# Altium PCB TinyArduino.PcbDoc
Units mil, origin at the board's own origin, x right, y up, seen from the top; angles counter-clockwise.
Board outline 477 x 643 mil, 4 copper layers (Top Layer, Signal Layer 1, Signal Layer 2, Bottom Layer), stack 30.634 mil thick; 13 components, 12 nets, 45 pads, 2 vias.
Unrouted connection lines stored in the file: 8.
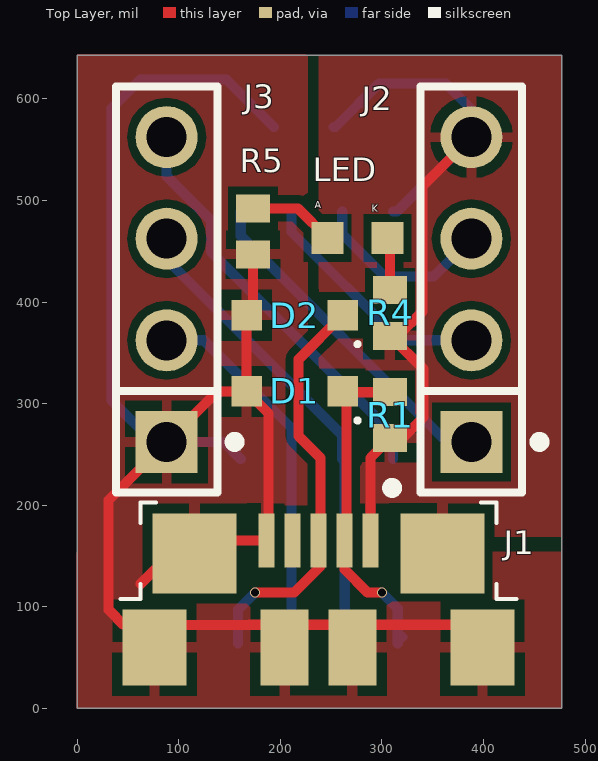
[diagram p0: Top Layer view]
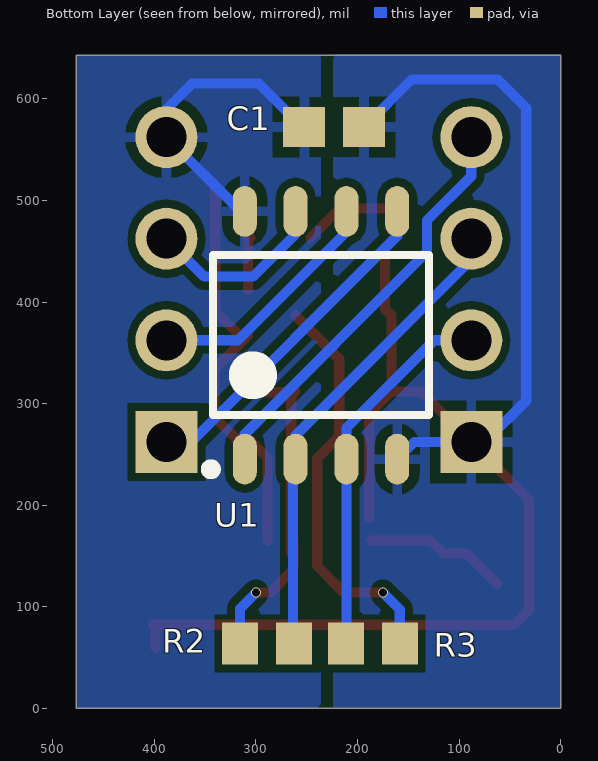
[diagram p1: Bottom Layer view, seen from below]

## Layer stack, top to bottom
Top Solder: solder mask 0.4, Solder Resist, Dk 3.5
Top Layer: signal copper 1.4
Dielectric 1: core 10, FR-4, Dk 4.2
Signal Layer 1: signal copper 1.417
Dielectric 3: prepreg 5, Dk 4.2
Signal Layer 2: signal copper 1.417
Dielectric 2: core 10, Dk 4.2
Bottom Layer: signal copper 1.4
Bottom Solder: solder mask 0.4, Solder Resist, Dk 3.5

## Board outline
477,0 477,643 0,643 0,0

## Design rules (kind name [scope] priority, off if disabled: settings)
AssemblyTestpoint [All] p1: testpointundercomponent=TRUE minsize=10 maxsize=100 preferedsize=60 minholesize=0 maxholesize=40 preferedholesize=32 testpointgrid=1 usegrid=FALSE gridtolerance=0.01 allowsidetop=TRUE allowsidebottom=TRUE
Clearance [All] p1: gap=8 ignorepadtopadclearanceinfootprint=FALSE
FabricationTestpoint [All] p1: side=3 testpointundercomponent=TRUE minsize=10 maxsize=100 preferedsize=60 minholesize=0 maxholesize=40 preferedholesize=32 testpointgrid=1 allowsidetop=TRUE allowsidebottom=TRUE usegrid=FALSE gridtolerance=0.01
MinimumSolderMaskSliver [All] p1: minsoldermaskwidth=3
PolygonConnect [All] p1: connectstyle=Relief reliefconductorwidth=10 reliefentries=4 polygonreliefangle="90 Angle" airgapwidth=10
RoutingVias [All] p1: holewidth=8 width=10 viastyle="Through Hole" minholewidth=8 minwidth=10 maxholewidth=8 maxwidth=10
SilkToSolderMaskClearance [IsPad] p1: minsilkscreentomaskgap=3 clearancetoexposedcopper=TRUE
SolderMaskExpansion [All] p1: expansion=4
Width [All] p1: maxlimit=10 minlimit=10 preferedwidth=10
26 further rules are at their usual default settings.

## Components (designator, comment, footprint, x,y, rotation, side; value= is the part's Value field where it differs from the comment)
C1 "0603YC104JAT2A" CAPC1608X90X35NL15T15 223.09,572.32 r0 bottom value=Value
D1 "Diodes Inc. B0540WS-7" PCB-6tqbiewd2diqb4h5r69p-1 214,312 r180 top
D2 "Diodes Inc. B0540WS-7" PCB-6tqbiewd2diqb4h5r69p-1 214,387 r180 top
J1 "ZX62R-B-5P" HIRO-ZX62R-B-5P_V 237.54,112.66 r0 top locked
J2 "Conn_Molex_90120-0764_eec" Molex_90120-0764_0 388.09,412.32 r90 top locked
J3 "Conn_Molex_90120-0764_eec" Molex_90120-0764_0 88.09,412.32 r90 top locked
LED "LED_AvagoHSMG-C190" AVAG-HSMX-C190 276,463 r0 top locked (schematic designator *)
R1 "Res_Vishay_CRCW06031K50FKEA_eec" RESC1609X50X30LL10T20 308,288.58 r270 top value=1.5K
R2 "CRCW060368R0JNEA" RESC1609X50X30ML10T20 289,64 r0 bottom value=68
R3 "CRCW060368R0JNEA" RESC1609X50X30ML10T20 185,64 r180 bottom value=68
R4 "CRCW0603390RFKEA" RESC1609X50X30LL10T20 308,389.42 r90 top locked value=390
R5 "CRCW06030000Z0EA" RESC1609X50X30LL10T20 173.09,469.58 r270 top locked
U1 "ATtiny85-20SU" 8S2_L 236,367.32 r90 bottom

## Footprints (in the part's own frame and the unit in brackets; to place one, negate y for a bottom-side part, rotate by r counter-clockwise, add the part's x,y. Pads: shape width x height; smd on the part's side, far side on the other; paste and mask are expansions set on the pad)
8S2_L [mm] "SOP, 8-Leads, Body 5.3x5.3mm, Pitch 1.27mm, IPC High Density"
  oval 1.27x0.6 smd: 1(-3.096,1.905) 2(-3.096,0.635) 3(-3.096,-0.635) 4(-3.096,-1.905) 5(3.096,-1.905) 6(3.096,-0.635) 7(3.096,0.635) 8(3.096,1.905)
  silkscreen extent -3.47,-2.7 2,2.88, body extent -2.7,-2.68 2.7,2.68, height 0.25
AVAG-HSMX-C190 [mm] "AVAG-HSMX-C190"
  rect 0.8x0.8 smd: 1(-0.75,0) 2(0.75,0)
  body extent -0.85,-0.45 0.85,0.45, height 0.9
CAPC1608X90X35NL15T15 [mm] "CAPC1608X90X35NL15T15"
  rect 1.05x1 smd: 1(-0.75,0) 2(0.75,0)
  body extent -0.8,-0.4 0.8,0.4, height 0.55
HIRO-ZX62R-B-5P_V [mm]
  rect 0.4x1.35 smd: 1(1.3,1.338) 2(0.65,1.338) 3(0,1.338) 4(-0.65,1.338) 5(-1.3,1.338)
  rect 2.1x2 smd: 6(-3.1,1.012) 11(3.1,1.012)
  rect 1.6x1.9 smd: 7(-4.1,-1.338) 10(4.1,-1.338)
  rect 1.2x1.9 smd: 8(-0.85,-1.338) 9(0.85,-1.338)
  silkscreen extent -4.95,-0.13 4.95,2.78, body extent -4.4,-3.95 4.4,1.78, height 2.71
Molex_90120-0764_0 [mm]
  rect 1.55x1.55 hole 1 paste-1000 mask+0: 1(-3.81,0)
  round 1.55 hole 1 paste-1000 mask+0: 2(-1.27,0) 3(1.27,0) 4(3.81,0)
  silkscreen extent -5.08,-1.83 5.08,1.27, body extent -5.08,-1.26 5.08,1.24, height 5.31
PCB-6tqbiewd2diqb4h5r69p-1 [mil] "DIOD-1N4148WS-SOD-323-2"
  rect 30x30 smd: 1(-47.24,0) 2(47.24,0)
  silkscreen extent -64,27 -60,31, body extent -35,-28 35,28, height 47
RESC1609X50X30LL10T20 [mm] "RESC1609X50X30LL10T20"
  rect 0.7x0.85 smd: 1(-0.575,0) 2(0.575,0)
  body extent -0.82,-0.48 0.82,0.48, height 0.5
RESC1609X50X30ML10T20 [mm] "RESC1609X50X30ML10T20"
  rect 0.9x1.05 smd: 1(-0.675,0) 2(0.675,0)
  body extent -0.82,-0.48 0.82,0.48, height 0.5

## Part data
C1: "Imported", Built_By=EMA_UL_Team, C="Copyright (C) 2015 Accelerated Designs. All rights reserved", Manufacturer_Part_Number=0603YC104JAT2A, RefDes=RefDes, Type=DEV, Vendor="AVX Corporation"
D1 D2: library part B0540WS-7, "DIODE SCHOTTKY 40V 500MA SOD323", Average Rectified Current=500mA, Capacitance=125pF, Forward Voltage=550mV, Manufacturer=Diodes, Max Forward Surge Current (Ifsm)=3A, Max Operating Temperature=125°C, Max Repetitive Reverse Voltage (Vrrm)=40V, Min Operating Temperature=-40°C, Package Quantity=3000, Peak Reverse Current=5uA, Supplier Part Number 1=B0540WSDICT-ND, Category="Productos semiconductores discretos", Contact Plating=Matte,Tin, Current Rating=500mA, Element Configuration=Single, Forward Current=500mA, Height=1mm, Lead Free="Lead Free", Length=1.8mm, Manufacturer Part Number=B0540WS-7, Max Reverse Voltage (DC)=40V, Mount="Surface Mount", Number of Pins=2, Output Current=500mA, Packaging="Tape and Reel", Peak Non-Repetitive Surge Current=3A, Polarity=Standard, Pricing 1="1=0.43, 10=0.317, 100=0.1796, 500=0.11896, 1000=0.09121 (USD)", Radiation Hardening=No, REACH SVHC="No SVHC", Stock 1=122360, Supplier 1=Digi-Key, Termination=SMD/SMT, Voltage Rating (DC)=40V, Weight=0.000173oz, Width=1.4mm
J1: "Connector; USBMicro-B,Reverse type, SMT; 5 Position; Right Angle", Operating Temperature="-30 to 85 degC", ComponentLink1Description="Manufacturer URL", ComponentLink1URL=http://www.hirose.com/‎, ComponentLink2Description=Datasheet, ComponentLink2URL=http://www.hirose.co.jp/cataloge_hp/e24200011.pdf, DatasheetVersion=08/2010, Mounting Technology="Surface Mount", PackageDescription="5-Pin USB Micro-B R/A Connector", PackageReference=ZX62R-B-5P, PartNumber=ZX62R-B-5P
J2 J3: "CONN 4 Positions Header, Breakaway Connector 0.100\" (2.54mm) Through Hole Gold", Current - Maximum per Contact=3.0A, Digikey Part Number=WM8086-ND, Manufacturer=Molex, Mouser Part Number=538-90120-0764, Package=HDR4, Part Number=90120-0764, Temperature="-55°C to +125°C", Temperature Range High=+125°C, Temperature Range Low=-55°C, Voltage - Maximum=350V, ComponentLink1Description=Upverter, ComponentLink1URL=https://upverter.com/upn/revision/abd89bfd3815e4cd/, ComponentLink2Description=Datasheet, ComponentLink2URL=http://www.molex.com/pdm_docs/sd/901200764_sd.pdf, Contact Length - Mating=6.75mm, Contact Length - Post=2.90mm, Digikey Description="CONN 4 Positions Header, Breakaway Connector 0.100\" (2.54mm) Through Hole Gold", helpURL=https://upverter.com/upn/revision/abd89bfd3815e4cd/, Insulation Height=2.50mm, Lead Free=yes, Number of Positions=4, Pitch=2.54mm, RoHS=TRUE, Supplier 1=Digi-Key, Supplier 2=Mouser, Supplier Part Number 1=WM8086-ND, Supplier Part Number 2=538-90120-0764
R1: "RES 1.5k Ohm ±1% 0.1W, 1/10W Chip Resistor 0603 (1608 Metric) Automotive AEC-Q200 Thick Film", Digikey Part Number=541-1.50KHCT-ND, Manufacturer=Vishay, Mouser Part Number=71-CRCW0603-1.5K-E3, Package="0603 (1608 metric)", Part Number=CRCW06031K50FKEA, Power=100mW, Resistance=1.5K, Temperature="-55°C to +155°C", Temperature Coefficient=±100ppm/°C, Temperature Range High=+155°C, Temperature Range Low=-55°C, Tolerance=±1%, Voltage=75V, ComponentLink1Description=Upverter, ComponentLink1URL=https://upverter.com/upn/revision/92de3c491728bf4e/, ComponentLink2Description=Datasheet, ComponentLink2URL=http://www.vishay.com/docs/20035/dcrcwe3.pdf, Digikey Description="RES 1.5k Ohm ±1% 0.1W, 1/10W Chip Resistor 0603 (1608 Metric) Automotive AEC-Q200 Thick Film", helpURL=https://upverter.com/upn/revision/92de3c491728bf4e/, Ipc Land Pattern Name=RESC16080X45, Lead Free=yes, Price=0.0140695309128, RoHS=TRUE, Supplier 1=Digi-Key, Supplier 2=Mouser, Supplier Part Number 1=541-1.50KHCT-ND, Supplier Part Number 2=71-CRCW0603-1.5K-E3
R2 R3: "RES SMD 68 OHM 5% 1/10W 0603", Built_By=EMA_UL_Team, C="Copyright (C) 2015 Accelerated Designs. All rights reserved", Manufacturer_Part_Number=CRCW060368R0JNEA, RefDes=RefDes, Type=DEV, Vendor=Vishay
R4: "Imported", Manufacturer_Part_Number=CRCW0603390RFKEAHP, Built_By=EMA_UL_Team, C="Copyright (C) 2015 Accelerated Designs. All rights reserved", RefDes=RefDes, Type=DEV, Vendor=Vishay
R5: "0O 1%", ComponentLink1Description=Datasheet, ComponentLink1URL=http://www.vishay.com/docs/20035/dcrcwe3.pdf, PackageReference=0603, PartNumber=CRCW06030000Z0EA
U1: library part ATTINY85-20SU, "8-bit AVR Microcontroller, 20MHz, 2.7-5.5V, 8K Flash, 512 Bytes EEPROM, 512 Bytes SRAM, Industrial Grade (-40°C to 85°C), 8-Lead SOIC, Pb-Free", ComponentLink1Description="Manufacturer URL", ComponentLink1URL=http://www.atmel.com/, ComponentLink2Description="ATtiny25/45/85 Datasheet", ComponentLink2URL=http://www.atmel.com/dyn/resources/prod_documents/doc2586.pdf, ComponentLink3Description="ATtiny25/45/85 Summary", ComponentLink3URL=http://www.atmel.com/dyn/resources/prod_documents/2586S.pdf, DatasheetVersion="revN, Apr-2011", PackageDescription="8-Lead, 0.208\" Body, Plastic Small Outline Package (EIAJ)", PackageReference=8S2, PackageVersion="revF, Apr-2008", PartNumber=ATTINY85-20SU, RevisionNote="DatasheetVersion updated. URLs added."

## Via types
v1: diameter 10, hole 8, Top Layer to Bottom Layer, 2 vias

## Nets (pads, with @x,y where several pads share a name; then routed paths per layer and width w, separated by ;. In a path a pad name is that pad's centre, name@x,y a point inside that pad or via, vN(x,y) a via of type N, cw(c..) or ccw(c..) an arc to the next point about the centre after c; other vN are vias at no path point)
+5V: C1.2 J1.1 J1.11 J2.4 R1.2 R4.1 U1.8 | length 783.9
  Top Layer w10: J1.1 288.72,246.65 R1.2 ; R1.2@311.62,265.94 311.62,257.53 341,286.91 341,333.78 R4.1 315.78,366.78 340,391 340,514.23 J2.4
  Bottom Layer w10: C1.2 254.32,572.32 297,615 363,615 388.09,589.91 J2.4 314.98,489.21 U1.8
\R\E\S\E\T\: J3.4 U1.1 | length 409.2
  Bottom Layer w10: J3.4 88.09,523.85 131.6,480.34 131.6,449.4 311,270 U1.1
D+: D2.1 J1.3 R3.2 | length 406
  Top Layer w10: v1(175,114) 213.46,114 239.62,140.16 239.62,246.38 218,268 218,343.76 D2.1
  Bottom Layer w10: R3.2 158.43,97.43 v1(175,114)
D-: D1.1 J1.2 R1.1 R2.2 | length 338.7
  Top Layer w10: D1.1 D1.1@262.03,311.21 ; J1.2 263.13,136.87 286,114 v1(300,114) ; J1.2@265.21,152.79 265.21,308.03 D1.1@262.03,311.21 ; R1.1 D1.1@262.03,311.21
  Bottom Layer w10: v1(300,114) 315.57,98.43 R2.2 ; R2.2@319.57,70 R2.2@320,70.43
GND: C1.1 D1.2 D2.2 J1.5 J1.6 J1.7 J1.8 J1.9 J1.10 J3.1 R5.2 U1.4 | length 1728.7
  Top Layer w10: 62.54,122.66 92.4,152.52 J1.6 128.28,165.32 J1.5 ; R5.2 173.09,393.33 D2.2 D1.2 ; J1.5@188.44,187.63 188.44,290.32 D1.2 ; J1.10 J1.10@398.95,82.32 ; J1.10@401.04,82.32 J1.10@398.95,82.32 ; D1.2 137.77,312 J3.1 31,205.23 31,97 46,82 169.52,82 169.83,82.32 J1.10@398.95,82.32
  Bottom Layer w10: U1.4 144.11,262.32 J3.1 74.68,262.32 34,303 34,591 62,619 146.87,619 C1.1
Net*_1: LED.1 R5.1 | length 85.5
  Top Layer w10: R5.1 217.25,492.22 LED.1
Net*_2: LED.2 R4.2 | length 52
  Top Layer w10: LED.2 308,460.53 R4.2
PB0: J2.1 U1.5 | length 335.2
  Bottom Layer w10: U1.5 161,465.1 363.78,262.32 J2.1
PB1: J2.2 U1.6 | length 241.5
  Bottom Layer w10: U1.6 211,469 317.68,362.32 J2.2
PB2: J2.3 U1.7 | length 182.1
  Bottom Layer w10: U1.7 261,467 303,425 350.77,425 J2.3
PB3: J3.3 R2.1 U1.2 | length 464.9
  Bottom Layer w10: J3.3 88.09,441.91 261,269 U1.2 263.43,243 R2.1@263.43,70
PB4: J3.2 R3.1 U1.3 | length 364.9
  Bottom Layer w10: J3.2 124.68,362.32 211,276 U1.3 211,70.57 R3.1@211.57,70
pads on no net: J1.4

## Polygon pours and split planes (outlines as drawn)
GND on Top Layer "+5V" (solid, pour order 14): 0,152.52 227,152.52 227,642 225,644 0,644
+5V on Top Layer "+5V" (solid, pour order 12): 478,169 238,169 238,643 476,643 476,169 477,168
GND on Top Layer "GND" (solid, pour order 8): 477,0 477,154 0,154 -1,153 -1,0
+5V on Bottom Layer "+5V" (solid, pour order 20): 477,0 476,1 476,643 238,643 236,641 236,3.96 239.96,0
+5V on Bottom Layer "+5V" (solid, pour order 18): 635,331
GND on Bottom Layer "GND" (solid, pour order 16): 225,644 0,644 0,1 224,1 224,639 227,642

## Other copper
Top Layer:
  region: 39,142

## Text inside footprints (layer, text, board x,y; h text height)
J1: Top Mechanical13 "Board edge" at 457.54,7.66 h7.87
LED: Top Overlay "K" at 290,498 h11.81 r180; Top Overlay "A" at 234,490 h11.81